# EAGLE board CT_schematic (EAGLE 7.6.0)

Size 158.08 x 80 mm. Coordinates in mm from the lower left corner, seen from the top.
Outline: 58.08,0 158.08,0 158.08,80 58.08,80 58.08,0
Copper layers (1*16): Top 0.035mm / dielectric 1.5mm / Bottom 0.035mm
Design rules "default": minimum track width 10mil, minimum drill 24mil, track to track 8mil, track to pad 8mil, pad to pad 8mil, via to via 8mil, smd to smd 8mil, copper to edge 40mil, drill to drill 8mil, minimum pad ring 10mil, minimum via ring 8mil, stop-mask expansion 4mil, vias tented up to drill 0mil, thermal gap 10mil

## Footprints (pad centres in the part's own frame; a part is rotated, then mirrored left to right if it is on the bottom)
C0603 = smd 0.8 x 0.8: 1 -0.762,0; 2 0.762,0
C0402 = smd 0.5 x 0.5: 1 -0.508,0; 2 0.508,0
EXV-9B = smd 2.718 x 1.778: 1 -2.108,0; 2 2.108,0
EXV-9H = smd 3.505 x 1.676: 1 -2.857,0; 2 2.857,0
PJ-037B_PACKAGE = drill 3.7 square: 1 12,0 | drill 3.2 square: 2 6,0
R0603 = smd 0.8 x 0.8: 1 -0.762,0; 2 0.762,0
WLCSP72 = smd 0.25 x 0.25: A1 -1.597,1.597; A2 -1.201,1.597; A3 -0.794,1.597; A4 -0.397,1.597; A5 0,1.597; A6 0.407,1.597; A7 0.804,1.588; A8 1.201,1.597; A9 1.607,1.597; B1 -1.597,1.201; B2 -1.201,1.201; B3 -0.794,1.201; B4 -0.397,1.201; B5 0,1.201; B6 0.407,1.201; B7 0.804,1.201; B8 1.201,1.201; B9 1.607,1.201; C1 -1.597,0.804; C2 -1.201,0.804; C3 -0.794,0.804; C4 -0.397,0.804; C5 0,0.804; C6 0.407,0.804; C7 0.804,0.804; C8 1.201,0.804; C9 1.607,0.804; D1 -1.597,0.397; D2 -1.201,0.397; D3 -0.794,0.397; D7 0.804,0.397; D8 1.201,0.397; D9 1.607,0.397; E1 -1.597,0; E2 -1.201,0; E3 -0.794,0; E7 0.804,0; E8 1.201,0; E9 1.607,0; F1 -1.597,-0.407; F2 -1.201,-0.407; F3 -0.794,-0.407; F7 0.804,-0.407; F8 1.201,-0.407; F9 1.607,-0.407; G1 -1.597,-0.804; G2 -1.201,-0.804; G3 -0.794,-0.804; G4 -0.397,-0.804; G5 0,-0.804; G6 0.407,-0.804; G7 0.804,-0.804; G8 1.201,-0.804; G9 1.607,-0.804; H1 -1.597,-1.201; H2 -1.201,-1.201; H3 -0.794,-1.201; H4 -0.397,-1.201; H5 0,-1.201; H6 0.407,-1.201; H7 0.804,-1.201; H8 1.201,-1.201; H9 1.607,-1.201; J1 -1.597,-1.607; J2 -1.201,-1.607; J3 -0.794,-1.607; J4 -0.397,-1.607; J5 0,-1.607; J6 0.407,-1.607; J7 0.804,-1.607; J8 1.201,-1.607; J9 1.607,-1.607
TST-110-05-T-D-RA = drill 1 pad 1.7 square: 1 0,0 | drill 1 pad 1.7: 2 0,2.54; 3 2.54,0; 4 2.54,2.54; 5 5.08,0; 6 5.08,2.54; 7 7.62,0; 8 7.62,2.54; 9 10.16,0; 10 10.16,2.54; 11 12.7,0; 12 12.7,2.54; 13 15.24,0; 14 15.24,2.54; 15 17.78,0; 16 17.78,2.54; 17 20.32,0; 18 20.32,2.54; 19 22.86,0; 20 22.86,2.54
SOIC-8 = smd 1.6 x 0.6: 1 -2.7,1.905 | smd 1.55 x 0.6: 2 -2.7,0.635; 3 -2.7,-0.635; 4 -2.7,-1.905; 5 2.7,-1.905; 6 2.7,-0.635; 7 2.7,0.635; 8 2.7,1.905
TFBGA-153 = smd 0.3 x 0.3: A1 -3.25,3.25; A2 -2.75,3.25; A3 -2.25,3.25; A4 -1.75,3.25; A5 -1.25,3.25; A6 -0.75,3.25; A7 -0.25,3.25; A8 0.25,3.25; A9 0.75,3.25; A10 1.25,3.25; A11 1.75,3.25; A12 2.25,3.25; A13 2.75,3.25; A14 3.25,3.25; B1 -3.25,2.75; B2 -2.75,2.75; B3 -2.25,2.75; B4 -1.75,2.75; B5 -1.25,2.75; B6 -0.75,2.75; B7 -0.25,2.75; B8 0.25,2.75; B9 0.75,2.75; B10 1.25,2.75; B11 1.75,2.75; B12 2.25,2.75; B13 2.75,2.75; B14 3.25,2.75; C1 -3.25,2.25; C2 -2.75,2.25; C3 -2.25,2.25; C4 -1.75,2.25; C5 -1.25,2.25; C6 -0.75,2.25; C7 -0.25,2.25; C8 0.25,2.25; C9 0.75,2.25; C10 1.25,2.25; C11 1.75,2.25; C12 2.25,2.25; C13 2.75,2.25; C14 3.25,2.25; D1 -3.25,1.75; D2 -2.75,1.75; D3 -2.25,1.75; D4 -1.75,1.75; D12 2.25,1.75; D13 2.75,1.75; D14 3.25,1.75; E1 -3.25,1.25; E2 -2.75,1.25; E3 -2.25,1.25; E5 -1.25,1.25; E6 -0.75,1.25; E7 -0.25,1.25; E8 0.25,1.25; E9 0.75,1.25; E10 1.25,1.25; E12 2.25,1.25; E13 2.75,1.25; E14 3.25,1.25; F1 -3.25,0.75; F2 -2.75,0.75; F3 -2.25,0.75; F5 -1.25,0.75; F10 1.25,0.75; F12 2.25,0.75; F13 2.75,0.75; F14 3.25,0.75; G1 -3.25,0.25; G2 -2.75,0.25; G3 -2.25,0.25; G5 -1.25,0.25; G10 1.25,0.25; G12 2.25,0.25; G13 2.75,0.25; G14 3.25,0.25; H1 -3.25,-0.25; H2 -2.75,-0.25; H3 -2.25,-0.25; H5 -1.25,-0.25; H10 1.25,-0.25; H12 2.25,-0.25; H13 2.75,-0.25; H14 3.25,-0.25; J1 -3.25,-0.75; J2 -2.75,-0.75; J3 -2.25,-0.75; J5 -1.25,-0.75; J10 1.25,-0.75; J12 2.25,-0.75; J13 2.75,-0.75; J14 3.25,-0.75; K1 -3.25,-1.25; K2 -2.75,-1.25; K3 -2.25,-1.25; K5 -1.25,-1.25; K6 -0.75,-1.25; K7 -0.25,-1.25; K8 0.25,-1.25; K9 0.75,-1.25; K10 1.25,-1.25; K12 2.25,-1.25; K13 2.75,-1.25; K14 3.25,-1.25; L1 -3.25,-1.75; L2 -2.75,-1.75; L3 -2.25,-1.75; L12 2.25,-1.75; L13 2.75,-1.75; L14 3.25,-1.75; M1 -3.25,-2.25; M2 -2.75,-2.25; M3 -2.25,-2.25; M4 -1.75,-2.25; M5 -1.25,-2.25; M6 -0.75,-2.25; M7 -0.25,-2.25; M8 0.25,-2.25; M9 0.75,-2.25; M10 1.25,-2.25; M11 1.75,-2.25; M12 2.25,-2.25; M13 2.75,-2.25; M14 3.25,-2.25; N1 -3.25,-2.75; N2 -2.75,-2.75; N3 -2.25,-2.75; N4 -1.75,-2.75; N5 -1.25,-2.75; N6 -0.75,-2.75; N7 -0.25,-2.75; N8 0.25,-2.75; N9 0.75,-2.75; N10 1.25,-2.75; N11 1.75,-2.75; N12 2.25,-2.75; N13 2.75,-2.75; N14 3.25,-2.75; P1 -3.25,-3.25; P2 -2.75,-3.25; P3 -2.25,-3.25; P4 -1.75,-3.25; P5 -1.25,-3.25; P6 -0.75,-3.25; P7 -0.25,-3.25; P8 0.25,-3.25; P9 0.75,-3.25; P10 1.25,-3.25; P11 1.75,-3.25; P12 2.25,-3.25; P13 2.75,-3.25; P14 3.25,-3.25
ABS07-32.768KHZ-7-T = smd 1.1 x 2.4: 1 -2.5,0; 2 0,0
ABLS-25.000MHZ-B2F-T = smd 5.6 x 2.8: 1 -3.81,0; 2 5.69,0
LP2954 = smd 1.6 x 0.6: 1 -2.475,1.905 | smd 1.55 x 0.6: 2 -2.475,0.635; 3 -2.475,-0.635; 4 -2.475,-1.905; 5 2.475,-1.905; 6 2.475,-0.635; 7 2.475,0.635; 8 2.475,1.905
SON-6 = smd 0.55 x 0.3: 1 -0.355,0.5 | smd 0.52 x 0.3: 2 -0.37,0; 3 -0.37,-0.5; 4 0.37,-0.5; 5 0.37,0; 6 0.37,0.5
SW_4-1437565-2 = smd 1.4 x 2.1: 1 -2.23,4.55; 2 -2.23,-4.55; 3 2.23,4.55; 4 2.23,-4.55
LGM67K-G1J2-24-Z = smd 0.8 x 1.4: A -2,0; C 0,0
NC7SZ125M5X = smd 1.3 x 0.7: 1 -1.3,0.95; 2 -1.3,0; 3 -1.3,-0.95; 4 1.3,-0.95; 5 1.3,0.95
DUMMY_PACKAGE_186 = drill 0.3: 1 0,-1; 2 1.5,-1; 3 3,-1

## Placement (x,y rotation side)
C1  1e-06  [C0603]  18.71,62.23 0 top
C2  1e-07  [C0603]  14.9,62.23 0 top
C3  1e-07  [C0603]  11.09,62.23 0 top
C4  1e-07  [C0603]  7.28,62.23 0 top
C5  1e-07  [C0603]  3.47,62.23 0 top
C6  1e-07  [C0603]  -0.34,62.23 0 top
C7  4.7e-06  [C0603]  33.95,62.23 0 top
C8  1e-07  [C0603]  -4.15,62.23 0 top  (outside the outline)
C9  1e-07  [C0603]  -7.96,62.23 0 top  (outside the outline)
C10  1e-07  [C0603]  42.84,67.31 0 top
C11  1e-08  [C0603]  39.03,67.31 0 top
C12  1e-06  [C0603]  35.22,67.31 0 top
C13  1e-11  [C0402]  8.55,67.31 0 top
C14  1e-11  [C0402]  4.74,67.31 0 top
C15  1e-11  [C0402]  0.93,67.31 0 top
C16  1e-11  [C0402]  -2.88,67.31 0 top
C17  1e-07  [C0402]  -6.69,67.31 0 top  (outside the outline)
C18  1e-07  [C0402]  -10.5,67.31 0 top  (outside the outline)
C19  1e-08  [C0402]  42.84,72.39 0 top
C20  1e-07  [C0402]  39.03,72.39 0 top
C21  2.2e-06  [C0603]  30.14,62.23 0 top
C22  2.2e-06  [C0603]  26.33,62.23 0 top
C23  1e-07  [C0402]  35.22,72.39 0 top
C24  1e-07  [C0402]  31.41,72.39 0 top
C25  2.2e-06  [C0603]  22.52,62.23 0 top
C26  1e-06  [EXV-9B]  41.57,45.72 0 top
C27  2.2e-06  [EXV-9B]  32.68,45.72 0 top
C28  1e-07  [C0402]  27.6,72.39 0 top
C29  0.0001  [EXV-9H]  3.47,31.75 0 top
C30  0.0001  [EXV-9H]  -7.96,31.75 0 top  (outside the outline)
C31  1e-08  [C0402]  23.79,72.39 0 top
C32  1e-08  [C0402]  19.98,72.39 0 top
C33  1e-08  [C0402]  16.17,72.39 0 top
J1  PJ-037B  [PJ-037B_PACKAGE]  16.17,7.62 0 top
R2  1000.0  [R0603]  31.41,67.31 0 top
R4  4700.0  [R0603]  27.6,67.31 0 top
R5  4700.0  [R0603]  23.79,67.31 0 top
R6  2200.0  [R0603]  19.98,67.31 0 top
R7  2200.0  [R0603]  16.17,67.31 0 top
R8  10000.0  [R0603]  32.68,52.07 0 top
R9  10000.0  [R0603]  27.6,52.07 0 top
R10  10000.0  [R0603]  22.52,52.07 0 top
R11  10000.0  [R0603]  17.44,52.07 0 top
R12  10000.0  [R0603]  12.36,52.07 0 top
R13  10000.0  [R0603]  7.28,52.07 0 top
R14  10000.0  [R0603]  2.2,52.07 0 top
R15  10000.0  [R0603]  -2.88,52.07 0 top
R16  10000.0  [R0603]  -7.96,52.07 0 top  (outside the outline)
R17  10000.0  [R0603]  42.84,57.15 0 top
R18  34000.0  [R0603]  37.76,57.15 0 top
R19  34000.0  [R0603]  32.68,57.15 0 top
R20  34000.0  [R0603]  27.6,57.15 0 top
R21  34000.0  [R0603]  22.52,57.15 0 top
R22  34000.0  [R0603]  17.44,57.15 0 top
R23  34000.0  [R0603]  12.36,57.15 0 top
R24  34000.0  [R0603]  7.28,57.15 0 top
R25  34000.0  [R0603]  2.2,57.15 0 top
R26  34000.0  [R0603]  -2.88,57.15 0 top
R27  34000.0  [R0603]  -7.96,57.15 0 top  (outside the outline)
R28  100000.0  [R0603]  -0.34,45.72 0 top
R29  100000.0  [R0603]  -5.42,45.72 0 top  (outside the outline)
R30  164658.62  [R0603]  4.74,45.72 0 top
R31  100000.0  [R0603]  -10.5,45.72 0 top  (outside the outline)
R32  10000.0  [R0603]  42.84,62.23 0 top
R33  10000.0  [R0603]  37.76,62.23 0 top
R34  9100.0  [R0603]  12.36,67.31 0 top
R35  680000.0  [R0603]  42.84,52.07 0 top
R36  120000.0  [R0603]  37.76,52.07 0 top
U1  STM32L476JEY6  [WLCSP72]  2.2,21.59 0 top
U2  TST-110-05-T-D-RA  [TST-110-05-T-D-RA]  11.09,29.21 0 top
U3  24AA1025T-I/SN  [SOIC-8]  17.44,22.86 0 top
U4  mtfc4gmcdm  [TFBGA-153]  37.76,8.89 0 top
U5  ABS07-32.768KHZ-7-T  [ABS07-32.768KHZ-7-T]  8.55,39.37 0 top
U6  ABLS-25.000MHZ-B2F-T  [ABLS-25.000MHZ-B2F-T]  31.41,39.37 0 top
U7  LP2954AIMX/NOPB  [LP2954]  32.68,22.86 0 top
U8  TPS3895ADRYR  [SON-6]  7.28,71.12 0 top
U9  4-1437565-2  [SW_4-1437565-2]  -0.34,6.35 0 top
U10  Q65110A2395  [LGM67K-G1J2-24-Z]  -0.34,39.37 0 top
U11  nc7sz125m5x  [NC7SZ125M5X]  25.06,45.72 0 top
U12  nc7sz125m5x  [NC7SZ125M5X]  18.71,45.72 0 top
U13  nc7sz125m5x  [NC7SZ125M5X]  12.36,45.72 0 top
U14  Dummy  [DUMMY_PACKAGE_186]  9.82,72.39 0 top

## Library data of the parts
C1-C33 J1 R2 R4-R36 U1-U14 = circuit_tree

## Nets
CLK_CRYSTAL_U1_C8: C13.1 U1.C8 U5.1
CLK_CRYSTAL_U1_C9: C14.1 U1.C9 U5.2
CLK_CRYSTAL_U1_D8: C15.1 U1.D8 U6.1
CLK_CRYSTAL_U1_D9: C16.1 U1.D9 U6.2
GND: C1.2 C2.2 C3.2 C4.2 C5.2 C6.2 C7.2 C8.2 C9.2 C10.2 C11.2 C12.2 C13.2 C14.2 C15.2 C16.2 C17.2 C18.2 C19.2 C20.2 C21.2 C22.2 C23.2 C24.2 C25.2 C26.2 C27.2 C28.2 C29.2 C30.2 C31.2 C32.2 C33.2 J1.2 R2.2 R8.2 R14.2 R17.2 R31.2 R34.2 R36.2 U1.A8 U1.B1 U1.G9 U1.J2 U1.J9 U2.4 U2.6 U2.8 U2.10 U2.12 U2.14 U2.16 U2.18 U2.20 U3.4 U3.7 U4.C4 U4.E7 U4.G5 U4.H10 U4.K8 U4.N2 U4.N5 U4.P4 U4.P6 U7.4 U8.2 U10.C U11.2 U11.3 U12.1 U12.3 U13.1 U13.3 U14.1
NET_U1_A5: R6.1 U1.A5 U3.6
NET_U1_A7: R7.1 U1.A7 U3.5
NET_U1_D7: R8.1 U1.D7
NET_U1_E9: R5.1 U1.E9 U13.4
NET_U1_J6: U10.A
NET_U1_J7: U9.3 U9.4
NET_U2_19: R14.1 U2.19
NET_U3_1: R16.1 U3.1
NET_U3_2: R17.1 U3.2
NET_U3_3: R15.1 U3.3
NET_U4_C2: C22.1 C23.1 U4.C2
NET_U4_K5: R4.1 U4.K5 U12.4
NET_U7_3: R29.1 U7.3
NET_U7_5: R28.1 U7.5
NET_U7_7: R30.2 R31.1 U7.7
NET_U8_1: R33.1 R34.1 U8.1
NET_U8_3: R35.2 R36.1 U8.3
NET_U8_4: R32.1 U8.4 U11.4 U12.2 U13.2
NET_U9_1: R2.1 U9.1 U9.2
PROC_PG9: U1.A4 U14.2
PROC_PG10: U1.B4 U14.3
PROC_SDMMC1_CK: R27.1 U1.B3 U4.M6
PROC_SDMMC1_CMD: R26.1 U1.A3 U4.M5
PROC_SDMMC1_D0: R18.1 U1.F2 U4.A3
PROC_SDMMC1_D1: R19.1 U1.E1 U4.A4
PROC_SDMMC1_D2: R20.1 U1.D3 U4.A5
PROC_SDMMC1_D3: R21.1 U1.C3 U4.B2
PROC_SDMMC1_D4: R22.1 U1.E7 U4.B3
PROC_SDMMC1_D5: R23.1 U1.E8 U4.B4
PROC_SDMMC1_D6: R24.1 U1.F3 U4.B5
PROC_SDMMC1_D7: R25.1 U1.F1 U4.B6
PROC_SYS_JTCK_SWCLK: R12.1 U1.B2 U2.9
PROC_SYS_JTDI: R10.1 U1.A2 U2.5
PROC_SYS_JTDO_SWO: U1.A6 U2.13
PROC_SYS_JTMS_SWDIO: R11.1 U1.C2 U2.7
PROC_SYS_JTRST: R9.1 U1.C6 U2.3
RST_OUT_U2_SRESET_B: R13.1 U2.15 U11.1
VCC_S1_5V2: C26.1 C29.1 C30.1 J1.1 R29.2 U7.8
VCC_TIER1_3V3: C1.1 C2.1 C3.1 C4.1 C5.1 C6.1 C7.1 C8.1 C9.1 C10.1 C11.1 C12.1 C17.1 C18.1 C19.1 C20.1 C21.1 C24.1 C25.1 C27.1 C28.1 C31.1 C32.1 C33.1 R4.2 R5.2 R6.2 R7.2 R9.2 R10.2 R11.2 R12.2 R13.2 R15.2 R16.2 R18.2 R19.2 R20.2 R21.2 R22.2 R23.2 R24.2 R25.2 R26.2 R27.2 R28.2 R30.1 R32.2 R33.2 R35.1 U1.A1 U1.A9 U1.B6 U1.B9 U1.G8 U1.H9 U1.J1 U1.J8 U2.1 U2.2 U3.8 U4.C6 U4.E6 U4.F5 U4.J10 U4.K9 U4.M4 U4.N4 U4.P3 U4.P5 U7.1 U8.6 U11.5 U12.5 U13.5

## Tracks (layer width: path | path; a pad name or v marks a point on that pad's centre or on a via)
CLK_CRYSTAL_U1_C8  (2 unrouted)
CLK_CRYSTAL_U1_C9  (2 unrouted)
CLK_CRYSTAL_U1_D8  (2 unrouted)
CLK_CRYSTAL_U1_D9  (2 unrouted)
GND  (75 unrouted)
NET_U1_A5  (2 unrouted)
NET_U1_A7  (2 unrouted)
NET_U1_D7  (1 unrouted)
NET_U1_E9  (2 unrouted)
NET_U1_J7  (1 unrouted)
NET_U2_19  (1 unrouted)
NET_U3_1  (1 unrouted)
NET_U3_2  (1 unrouted)
NET_U3_3  (1 unrouted)
NET_U4_C2  (2 unrouted)
NET_U4_K5  (2 unrouted)
NET_U7_3  (1 unrouted)
NET_U7_5  (1 unrouted)
NET_U7_7  (2 unrouted)
NET_U8_1  (2 unrouted)
NET_U8_3  (2 unrouted)
NET_U8_4  (4 unrouted)
NET_U9_1  (2 unrouted)
PROC_PG9  (1 unrouted)
PROC_PG10  (1 unrouted)
PROC_SDMMC1_CK  (2 unrouted)
PROC_SDMMC1_CMD  (2 unrouted)
PROC_SDMMC1_D0  (2 unrouted)
PROC_SDMMC1_D1  (2 unrouted)
PROC_SDMMC1_D2  (2 unrouted)
PROC_SDMMC1_D3  (2 unrouted)
PROC_SDMMC1_D4  (2 unrouted)
PROC_SDMMC1_D5  (2 unrouted)
PROC_SDMMC1_D6  (2 unrouted)
PROC_SDMMC1_D7  (2 unrouted)
PROC_SYS_JTCK_SWCLK  (2 unrouted)
PROC_SYS_JTDI  (2 unrouted)
PROC_SYS_JTDO_SWO  (1 unrouted)
PROC_SYS_JTMS_SWDIO  (2 unrouted)
PROC_SYS_JTRST  (2 unrouted)
RST_OUT_U2_SRESET_B  (2 unrouted)
VCC_S1_5V2  (5 unrouted)
VCC_TIER1_3V3  (74 unrouted)